# EAGLE board PicoITXUSB (EAGLE 5.11)
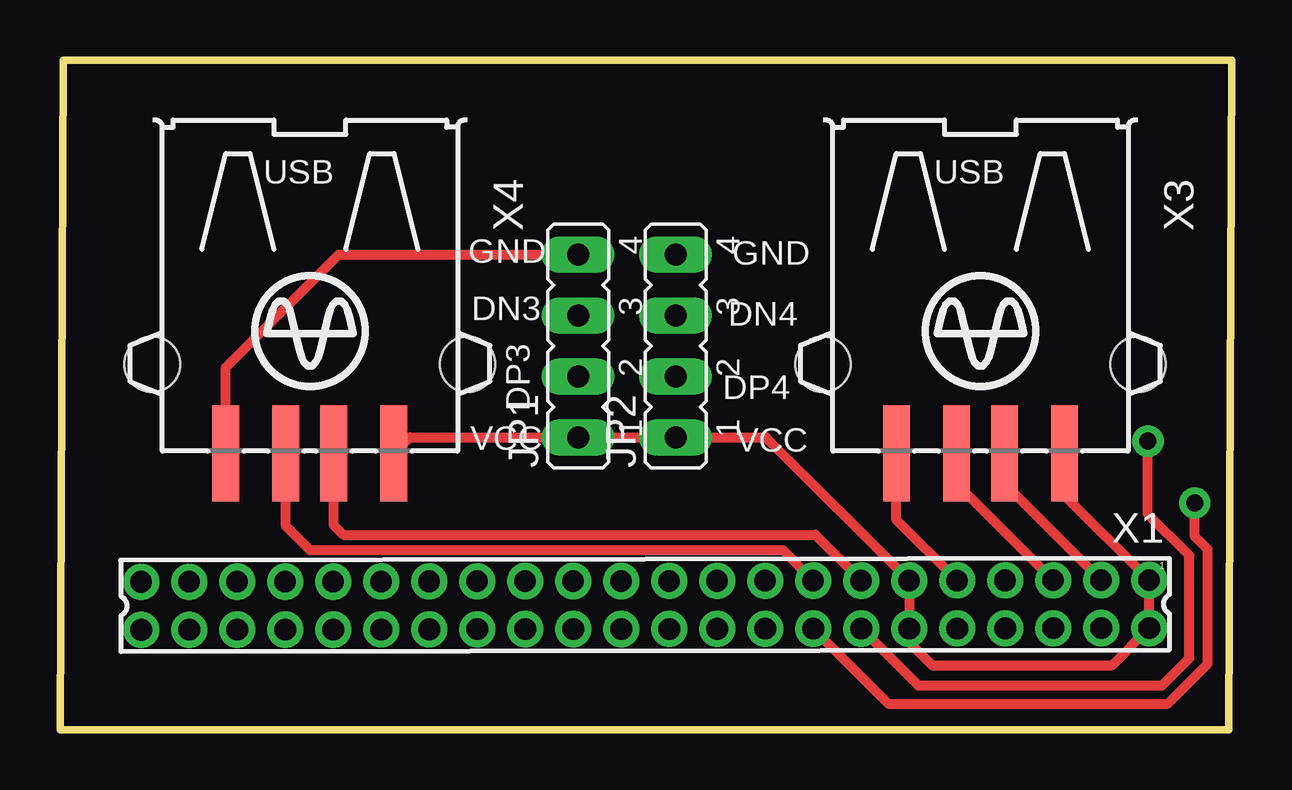
[diagram p0: board, top side]
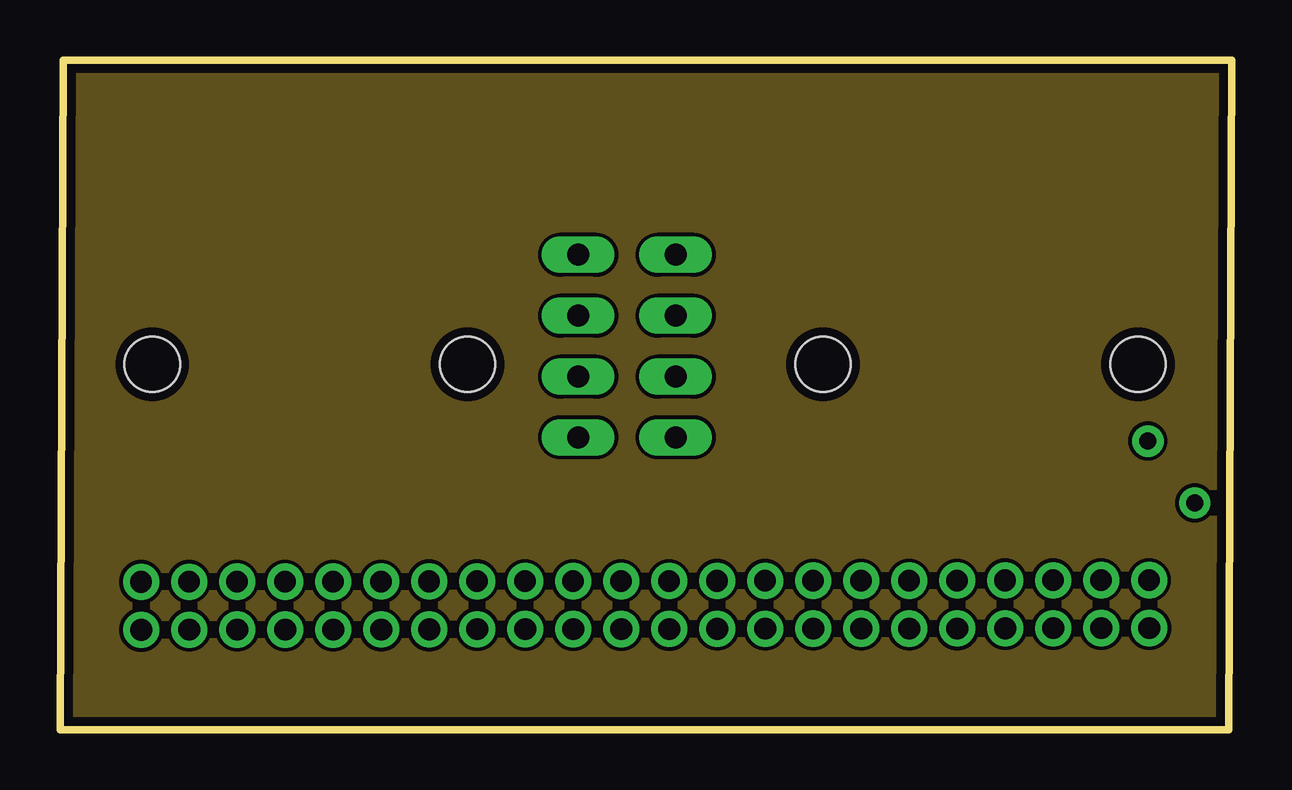
[diagram p1: board, inner layer Route2]
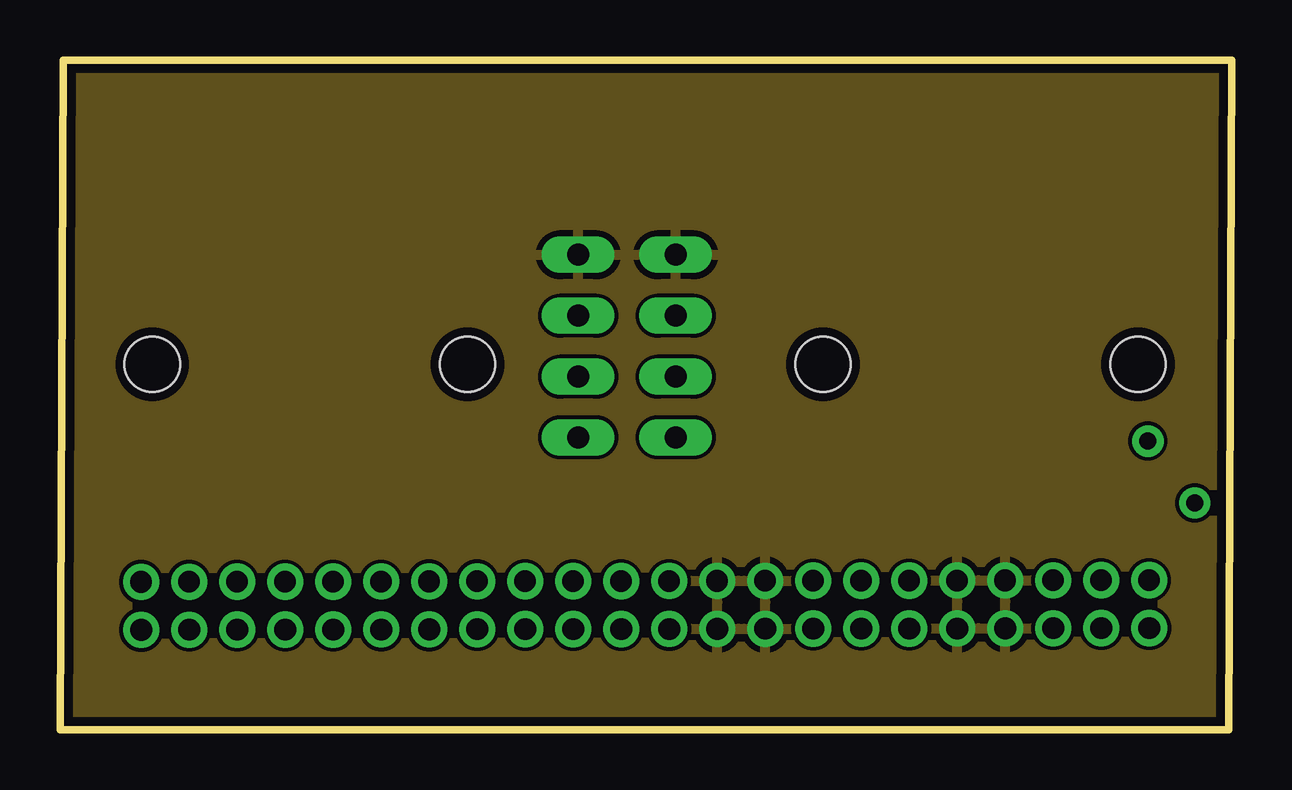
[diagram p2: board, inner layer Route15]
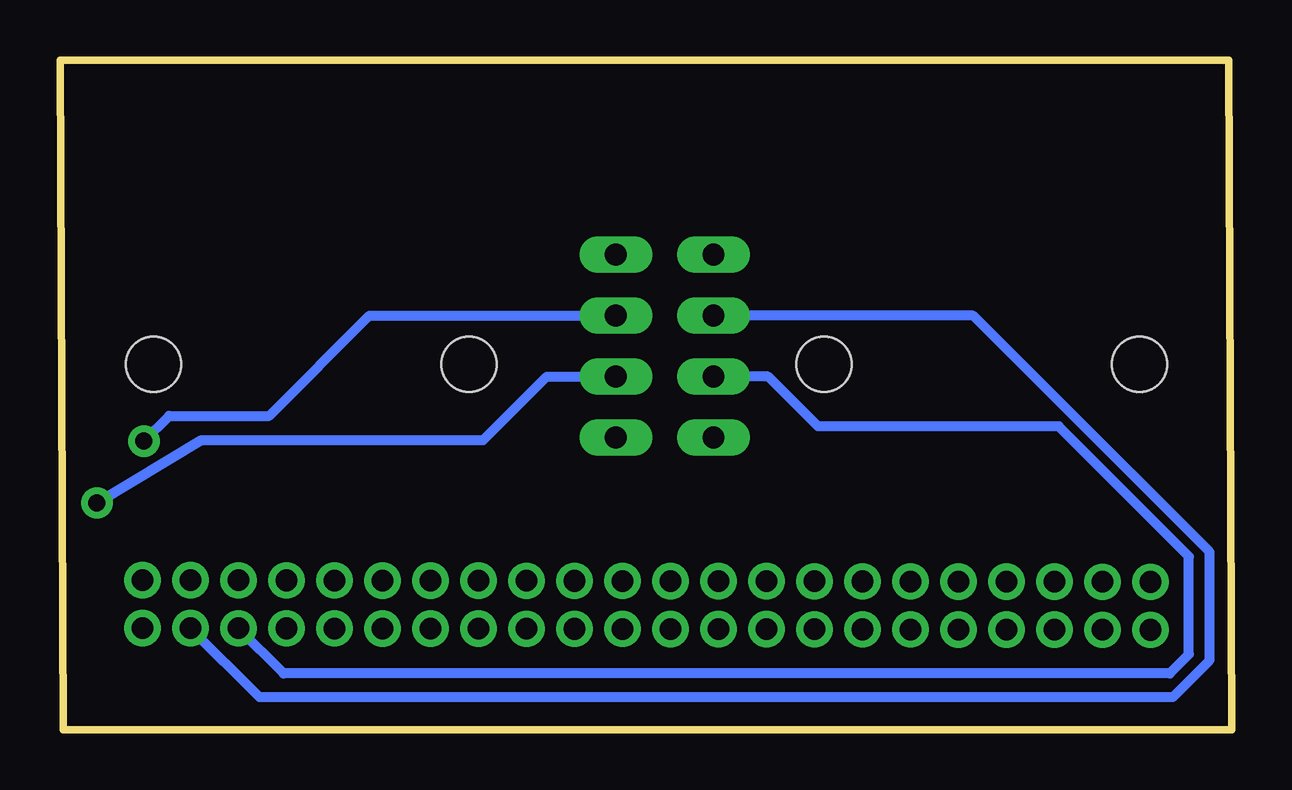
[diagram p3: board, bottom side, seen from below]

Size 48.82 x 27.93 mm. Coordinates in mm from the lower left corner, seen from the top.
Outline: 0,0 48.69,0 48.82,27.93 0.13,27.93 0,0
Copper layers (1*2*15*16): Top 0.0356mm / dielectric 1.5011mm / Route2 0.0356mm / dielectric 0.1499mm / Route15 0.0356mm / dielectric 0.2007mm / Bottom 0.0356mm
Design rules "Aerial-4Layer *": minimum track width 10mil, minimum drill 15mil, track to track 6mil, track to pad 6mil, pad to pad 6mil, via to via 12mil, smd to smd 6mil, copper to edge 15mil, drill to drill 8mil, minimum pad ring 12mil, minimum via ring 12mil, stop-mask expansion 4mil, vias tented up to drill 0mil, thermal gap 10mil

## Footprints (pad centres in the part's own frame; a part is rotated, then mirrored left to right if it is on the bottom)
JP4 = drill 0.914 long: 1 -3.81,0; 2 -1.27,0; 3 1.27,0; 4 3.81,0
87758-4416 = drill 0.9 pad 1.27 round: 1 -21,-1; 2 -21,1; 3 -19,-1; 4 -19,1; 5 -17,-1; 6 -17,1; 7 -15,-1; 8 -15,1; 9 -13,-1; 10 -13,1; 11 -11,-1; 12 -11,1; 13 -9,-1; 14 -9,1; 15 -7,-1; 16 -7,1; 17 -5,-1; 18 -5,1; 19 -3,-1; 20 -3,1; 21 -1,-1; 22 -1,1; 23 1,-1; 24 1,1; 25 3,-1; 26 3,1; 27 5,-1; 28 5,1; 29 7,-1; 30 7,1; 31 9,-1; 32 9,1; 33 11,-1; 34 11,1; 35 13,-1; 36 13,1; 37 15,-1; 38 15,1; 39 17,-1; 40 17,1; 41 19,-1; 42 19,1; 43 21,-1; 44 21,1
USB-A003 = smd 1.12 x 4: 1 -3.5,14; 2 -1,14; 3 1,14; 4 3.5,14 | hole 2.3: -6.57,10.28; 6.57,10.28

## Placement (x,y rotation side)
JP1  [JP4]  21.59,16 90 top
JP2  [JP4]  25.65,16 90 top
X1  87758-4416  [87758-4416]  24.38,5.21 180.1 top
X3  [USB-A003]  38.35,25.53 180 top
X4  [USB-A003]  10.41,25.53 180 top

## Library data of the parts
JP1 JP2 = jumper
X1 = con-molex; MF: MOLEX; MPN: 87758-4416; OC_FARNELL: unknown; OC_NEWARK: 59J1588
X3 X4 = con-yamaichi; OC_FARNELL: unknown; OC_NEWARK: unknown

## Nets
DN1: X1.3 X3.2
DN2: X1.13 X4.2
DN3: JP1.3 X1.4
DN4: JP2.3 X1.14
DP1: X1.5 X3.3
DP2: X1.15 X4.3
DP3: JP1.2 X1.6
DP4: JP2.2 X1.16
GND: JP1.4 JP2.4 X1.7 X1.8 X1.9 X1.10 X1.17 X1.18 X1.19 X1.20 X3.4 X4.4
VDD: JP1.1 JP2.1 X1.1 X1.2 X1.11 X1.12 X3.1 X4.1

## Tracks (layer width: path | path; a pad name or v marks a point on that pad's centre or on a via)
DN1
  Top 0.406: X3.2 39.35,10.27 X1.3
DN2
  Top 0.406: X4.2 11.41,8.53 11.81,8.13 31.48,8.13 X1.13
DN3
  Bottom 0.406: JP1.3 10.77,17.27 0.91,7.42 0.91,2.91 2.46,1.36 40.5,1.36 X1.4
DN4  (via drill 0.7)
  Top 0.406: v45.33,12.04 45.33,8.99 47.05,7.26 47.05,2.98 45.92,1.85 35.75,1.85 X1.14
  Bottom 0.406: JP2.3 35.93,17.27 40.11,13.09 44.27,13.09 v45.33,12.04
DP1
  Top 0.406: X3.3 37.35,10.27 X1.5
DP2
  Top 0.406: X4.3 9.41,8.49 10.41,7.49 30.11,7.49 X1.15
DP3
  Bottom 0.406: JP1.2 19.32,14.73 17.23,12.65 7.2,12.65 1.78,7.23 1.78,3.15 2.58,2.35 39.5,2.35 X1.6
DP4  (via drill 0.7)
  Top 0.406: v47.28,9.46 47.28,8.06 47.81,7.53 47.81,2.76 46.15,1.09 34.51,1.09 X1.16
  Bottom 0.406: JP2.2 28.54,14.73 31.19,12.08 42.93,12.08 v47.28,9.46
GND
  Top 0.406: JP1.4 11.61,19.81 6.91,15.11 X4.4 | X3.4 34.85,8.76 X1.9
  pour Route15: 0.39,27.65 48.44,27.65 48.44,0.39 0.39,0.39
VCC
  pour Route2: 0.39,27.57 48.2,27.57 48.2,0.46 0.39,0.46
VDD
  Top 0.406: X4.1 14.58,12.19 JP1.1 JP2.1 29.42,12.19 X1.11 | X1.11 X1.12 | X3.1 41.85,9.77 X1.1 X1.2 43.83,2.69 36.34,2.69 35.38,3.65 X1.11

## Text on the board
tPlace: GND | GND | DN3 | DN4 | DP4 | DP3 | VCC | VCC